# Altium PCB 蓝牙钥匙球锁20710.PcbDoc (part 2 of 2)
Units mil, origin at the board's own origin, x right, y up, seen from the top; angles counter-clockwise.
Board outline 1980 x 1974 mil, 2 copper layers (Top Layer, Bottom Layer); 82 components, 54 nets, 254 pads, 214 vias.
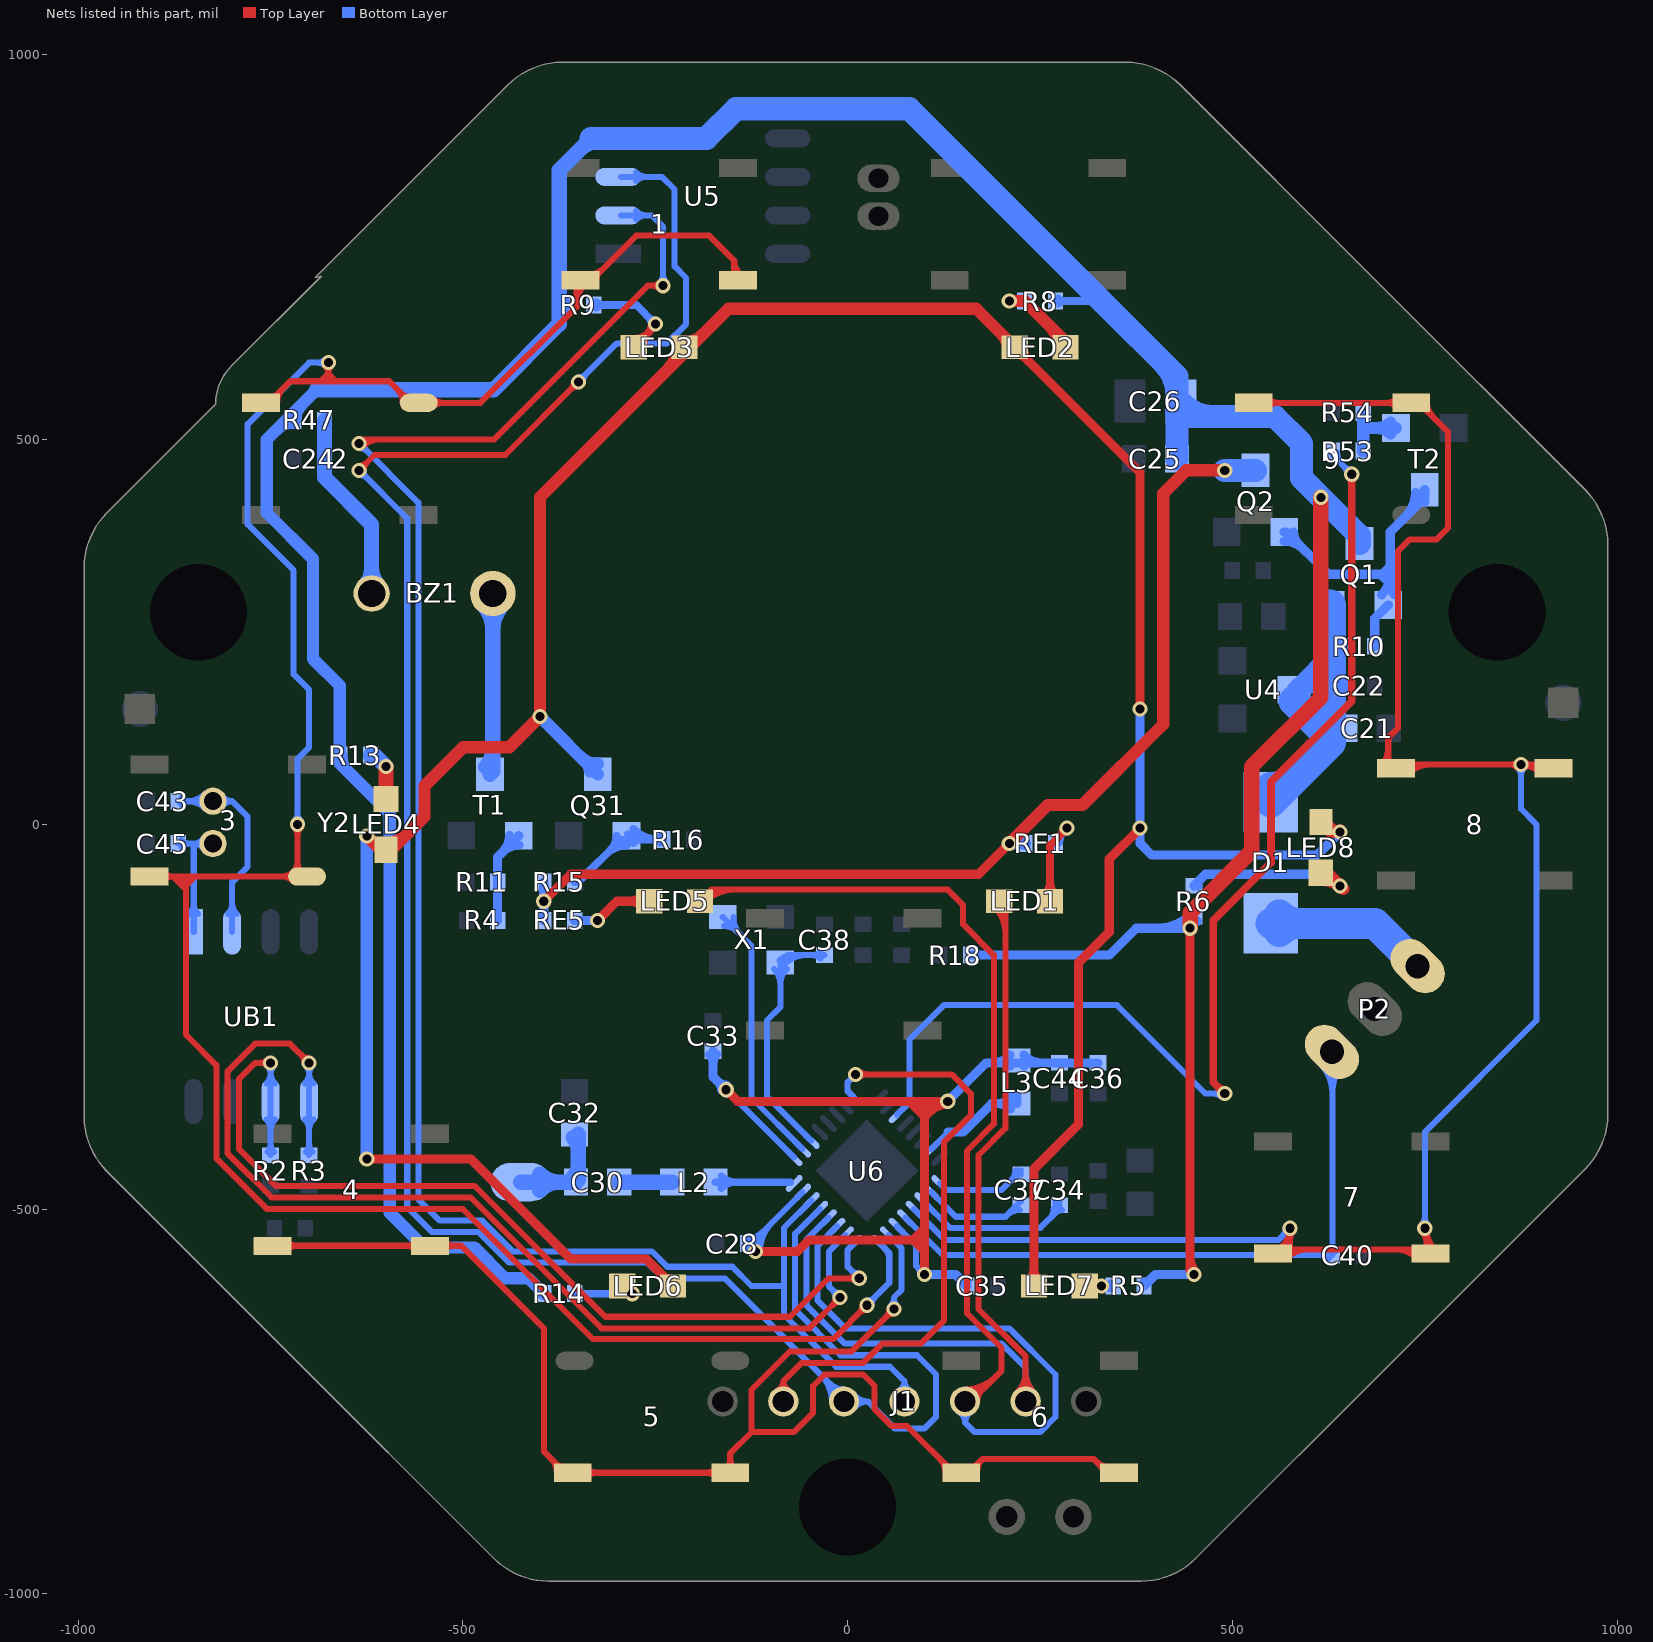
[diagram p2: the nets of this part, all layers, seen from the top]

## Via types
v1: diameter 19.68, hole 11.81, Top Layer to Bottom Layer, tented both sides, 214 vias

## Nets (pads, with @x,y where several pads share a name; then routed paths per layer and width w, separated by ;. In a path a pad name is that pad's centre, name@x,y a point inside that pad or via, vN(x,y) a via of type N, cw(c..) or ccw(c..) an arc to the next point about the centre after c; other vN are vias at no path point) (continued)
NetBZ1_1: BZ1.1 C24.2 R47.1 | length 302.6
  Bottom Layer w19.68: R47.1@-680,525 -680,451 -618.74,389.74 BZ1.1@-618.74,300 ; BZ1.1@-628.48,309.74 ccw(c-652.01,333.27) -618.74,333.27 ccw(c-585.47,333.27) BZ1.1@-609,309.74
NetBZ1_2: BZ1.2 T1.3 | length 336.7
  Bottom Layer w19.68: BZ1.2@-475.18,286.08 cw(c-508.78,252.48) -461.26,252.48 cw(c-413.74,252.48) BZ1.2@-447.34,286.08 ; T1.3@-470.77,74.42 ccw(c-493.72,97.38) -461.26,97.38 ; T1.3@-465,65 -461.26,68.74 BZ1.2@-461.26,300
NetC2_2: U6.2 X1.1 | length 389.5
  Bottom Layer w7.87: X1.1@-162.4,-120.47 -125,-157.87 -125,-355.68 U6.2@-58.52,-422.16 ; X1.1@-160.43,-132.28 cw(c-160.43,-156.05) -143.63,-139.24 ; X1.1@-148.62,-120.47 ccw(c-115.36,-120.47) -138.88,-144
NetC30_1: C30.1 L2.1 | length 69
  Bottom Layer w20: C30.1@-297,-465 L2.1@-228,-465
NetC30_2: C30.2 C32.2 pad.FR | length 225.9
  Bottom Layer w20: pad.FR@-425,-465 C30.2@-353,-465 ; pad.FR@-400.02,-475.61 cw(c-374.42,-501.21) -374.42,-465 cw(c-374.42,-428.79) pad.FR@-400.02,-454.39 ; C30.2@-357.06,-458.97 ccw(c-374.12,-441.91) -350,-441.91 ; C32.2@-357.1,-407.06 cw(c-374.23,-424.2) -350,-424.2 ; C30.2@-350,-462 C32.2@-350,-403
NetC34_1: C34.1 U6.19 | length 245.5
  Bottom Layer w7.87: U6.19@97.38,-488.97 132.97,-524.57 250.43,-524.57 275,-500 C34.1@275,-495 ; 262.72,-512.28 ccw(c250.66,-500.23) C34.1@267.71,-500.23 ; C34.1@270,-505 cw(c278.64,-513.64) C34.1@278.64,-501.42 ; C34.1@270,-500 270,-490 C34.1@275,-490
NetC37_1: C37.1 U6.17 | length 145.1
  Bottom Layer w7.87: U6.17@119.65,-466.7 127.95,-475 200,-475 220,-455 C37.1@225,-455 ; 210.36,-464.64 cw(c219,-473.29) C37.1@219,-461.06 ; 212.94,-462.06 ccw(c200.89,-450) C37.1@217.94,-450 ; C37.1@220,-450 C37.1@225,-450
NetC37_2: C37.2 U6.18 | length 157.2
  Bottom Layer w7.87: U6.18@108.52,-477.84 140.68,-510 205,-510 C37.2@225,-490 ; 206.82,-508.18 cw(c224,-525.36) C37.2@224,-501.06
NetC38_2: C38.2 U6.3 X1.3 | length 443
  Bottom Layer w7.87: X1.3@-95.95,-187.88 cw(c-116.11,-208.04) -87.6,-208.04 cw(c-59.08,-208.04) X1.3@-79.25,-187.88 ; X1.3@-88.41,-176.74 cw(c-72.13,-193.02) X1.3@-72.13,-170 ; X1.3@-82.85,-182.31 cw(c-53.12,-212.03) -53.12,-170 ; U6.3@-47.38,-411.03 -105,-353.41 -105,-255 -87.6,-237.6 X1.3@-87.6,-179.53 -78.07,-170 C38.2@-30,-170 ; C38.2@-35.29,-174.29 ccw(c-45.64,-184.64) -45.64,-170 ccw(c-45.64,-155.36) C38.2@-35.29,-165.71
NetC43_1: C43.1 UB1.2 Y2.2 | length 392.7
  Bottom Layer w8: C43.1@-870,30 -800,30 ; C43.1@-865.76,25.76 cw(c-855.51,15.51) -855.51,30 cw(c-855.51,44.49) C43.1@-865.76,34.24 ; -858.4,30 ccw(c-858.4,63.52) Y2.2@-834.7,39.82 ; -857.83,30 cw(c-857.83,-2.71) Y2.2@-834.7,20.42 ; Y2.2@-813.49,22.67 cw(c-800,13.94) -800,30 ; Y2.2@-813.38,37.4 ccw(c-800,45.79) -800,30 ; UB1.2@-805.52,-116.52 ccw(c-818.86,-103.19) -800,-103.19 ccw(c-781.14,-103.19) UB1.2@-794.48,-116.52 ; UB1.2@-800,-139.76 -800,-75 -780,-55 -780,10 -800,30
NetC45_2: C45.2 UB1.1 Y2.1 | length 244.1
  Bottom Layer w8: C45.2@-870,-25 -850,-25 ; C45.2@-865.76,-29.24 cw(c-855.51,-39.49) -855.51,-25 cw(c-855.51,-10.51) C45.2@-865.76,-20.76 ; UB1.1@-855.52,-116.52 ccw(c-868.86,-103.19) -850,-103.19 ccw(c-831.14,-103.19) UB1.1@-844.48,-116.52 ; UB1.1@-850,-139.76 -850,-25 ; Y2.1@-836.57,-32.37 ccw(c-850,-40.92) -850,-25 ; Y2.1@-836.57,-17.63 cw(c-850,-9.08) -850,-25 ; Y2.1@-825,-25 -850,-25
NetD1_1: D1.1 P2.1 | length 272.2
  Bottom Layer w40: D1.1@550,-128.74 685.1,-128.74 P2.1@740.68,-184.32 ; D1.1@560.91,-139.65 cw(c587.26,-166) 587.26,-128.74 cw(c587.26,-91.48) D1.1@560.91,-117.83
NetL2_2: L2.2 U6.32 | length 137.8
  Bottom Layer w10: L2.2@-172,-465 -75,-465 ; L2.2@-164.4,-472.6 cw(c-146.05,-490.95) -146.05,-465 cw(c-146.05,-439.05) L2.2@-164.4,-457.4
NetL3_2: L3.2 U6.15 | length 188
  Bottom Layer w7.87: U6.15@108.52,-422.16 130.68,-400
  Bottom Layer w11.81: L3.2@212,-353 L3.2@220,-353
  Bottom Layer w12: 130.68,-400 150,-400 187,-363 L3.2@215,-363 ; L3.2@211.14,-369.89 ccw(c194.5,-386.53) 194.5,-363 ccw(c194.5,-339.47) L3.2@211.14,-356.11 ; L3.2@220,-363 L3.2@215,-363 ; L3.2@220,-358 L3.2@215,-363
NetLED1_1: LED1.1 RE1.2 | length 225.8
  Top Layer w10: LED1.1@255.22,-92.22 ccw(c236.44,-73.44) 263,-73.44 ccw(c289.56,-73.44) LED1.1@270.78,-92.22 ; LED1.1@263,-100 263,-27 v1(285,-5) ; v1@280.16,-5 cw(c268.47,-5) 276.73,-13.27 cw(c285,-21.53) v1@285,-9.84
  Bottom Layer w10: RE1.2@270,-25 270,-20 v1(285,-5) ; RE1.2@275,-24 cw(c296.73,-24) v1@281.36,-8.64 ; v1@280.16,-5 cw(c268.47,-5) 276.73,-13.27 cw(c285,-21.53) v1@285,-9.84
NetLED2_1: LED2.1 R8.2 | length 152.5
  Top Layer w15.75: v1(210,680) 230,680 283,627 LED2.1@283,620 ; 262.47,647.53 cw(c234.94,620) LED2.1@273.87,620
  Bottom Layer w15.75: v1(210,680) R8.2@230,680
NetLED2_2: LED2.2 LED3.2 LED4.2 LED6.2 LED7.2 LED8.2 Q31.C | length 4323.1
  Top Layer w12: v1(-625,-435) -490,-435 -360,-565 -262,-565 LED6.2@-227,-600 ; -245.78,-581.22 cw(c-264.56,-600) LED6.2@-238,-600 ; LED6.2@-240.95,-586.05 ccw(c-229,-574.1) LED6.2@-229,-591 ; LED2.2@217,620 380,457 v1(380,150) ; LED2.2@219,611 cw(c219,594.1) LED2.2@230.95,606.05 ; LED2.2@228,620 ccw(c254.56,620) 235.78,601.22 ; LED7.2@235.64,-593.64 ccw(c220.27,-578.27) 242,-578.27 ccw(c263.73,-578.27) LED7.2@248.36,-593.64 ; LED7.2@242,-600 242,-448 300,-390 300,-180 340,-140 340,-45 v1(380,-5)
  Top Layer w16: v1(-625,-15) -607,-33 LED4.2@-600,-33 -593,-33 -550,10 -550,50 -500,100 -440,100 v1(-400,140) -400,425 -155,670 167,670 LED2.2@217,620 ; v1@-620.5,-19.5 ccw(c-607.18,-6.18) LED4.2@-601.95,-24.28 ; LED4.2@-600,-24 ccw(c-600,14.63) -572.69,-12.69 ; -232.31,592.69 ccw(c-259.63,620) LED3.2@-221,620 ; LED3.2@-210,627 ccw(c-210,655.97) -189.52,635.49 ; 201.64,635.36 cw(c186.27,620) LED2.2@208,620 ; LED8.2@615,3 628,-10 v1(640,-10) cw(c640,9.36) LED8.2@621.64,3.22 ; LED8.2@621,-3 ccw(c634.92,10.92) v1@639.57,-8.21
  Bottom Layer w12: v1(380,150) v1(380,-5) 380,-25 395,-40 610,-40 v1(640,-10)
  Bottom Layer w16: v1(-625,-435) v1(-625,-15) ; v1(-400,140) Q31.C@-325,65 ; -348.31,88.31 ccw(c-325,111.62) Q31.C@-325,78.65 ; Q31.C@-339.49,79.49 cw(c-350.32,68.65) Q31.C@-335,68.65
NetLED3_1: LED3.1 R9.2 | length 224
  Top Layer w10: LED3.1@-278,620 -250,648 v1(-250,650) ; LED3.1@-277,631 ccw(c-277,655.14) -259.93,638.07 ; LED3.1@-266,620 cw(c-237.03,620) -257.51,640.49 ; -259.68,638.32 ccw(c-271.36,650) v1@-254.84,650
  Bottom Layer w10: R9.2@-330,675 -275,675 v1(-250,650) ; R9.2@-326.46,671.46 cw(c-317.93,662.93) -317.93,675 cw(c-317.93,687.07) R9.2@-326.46,678.54 ; v1@-254.84,650 ccw(c-266.53,650) -258.27,658.27 ccw(c-250,666.53) v1@-250,654.84
NetLED4_1: LED4.1 R13.2 | length 79.6
  Top Layer w20: LED4.1@-600,33 v1(-600,75)
  Bottom Layer w20: R13.2@-620,89 cw(c-620,74.51) -609.76,84.76 ; R13.2@-620,90 -615,90 v1(-600,75)
NetLED5_1: LED5.1 RE5.2 | length 145.3
  Top Layer w12: v1(-325,-125) -300,-100 LED5.1@-258,-100 ; LED5.1@-266.07,-107.07 ccw(c-283.14,-124.14) -283.14,-100 ccw(c-283.14,-75.86) LED5.1@-266.07,-92.93
  Bottom Layer w12: RE5.2@-355,-125 v1(-325,-125)
NetLED6_1: LED6.1 R14.2 | length 109.3
  Top Layer w10: LED6.1@-295,-600 LED6.1@-293,-600
  Bottom Layer w10: R14.2@-355,-610 v1@-285,-610 ; R14.2@-351.46,-613.54 cw(c-342.93,-622.07) -342.93,-610 cw(c-342.93,-597.93) R14.2@-351.46,-606.46 ; v1@-283.42,-613.42 ccw(c-291.69,-621.69) -291.69,-610 ccw(c-291.69,-598.31) v1@-283.42,-606.58
  other v1: -280,-610
NetLED7_1: LED7.1 R5.2 | length 127.8
  Top Layer w10: LED7.1@308,-607 LED7.1@308,-600 v1(330,-600) ; LED7.1@318.04,-606.26 cw(c330,-614.54) v1(330,-600) ; LED7.1@318.04,-593.74 ccw(c330,-585.46) v1(330,-600) ; v1@326.58,-603.42 ccw(c318.31,-611.69) 318.31,-600 ccw(c318.31,-588.31) v1@326.58,-596.58
  Bottom Layer w10: v1(330,-600) R5.2@345,-600 ; v1@333.42,-603.42 cw(c341.69,-611.69) 341.69,-600 cw(c341.69,-588.31) v1@333.42,-596.58 ; R5.2@341.46,-603.54 ccw(c332.93,-612.07) 332.93,-600 ccw(c332.93,-587.93) R5.2@341.46,-596.46
NetLED8_1: LED8.1 R6.2 | length 276.2
  Top Layer w16: LED8.1@615,-72 cw(c615,-113.04) v1@644.02,-84.02 ; LED8.1@615,-63 623,-63 v1(640,-80)
  Bottom Layer w12: R6.2@450,-80 465,-65 625,-65 v1(640,-80) ; R6.2@455,-80 cw(c467.07,-80) R6.2@458.54,-71.46
NetQ1_G: Q1.G Q2.G R10.2 T2.3 | length 554.9
  Bottom Layer w12: Q2.G@567.4,368 cw(c567.4,332.76) 592.32,357.68 ; Q2.G@567.4,380 570,380 625,325 692.46,325 ; Q2.G@579.4,380 ccw(c602.1,380) 586.05,363.95 ; R10.2@685,231.42 685,267.6 Q1.G@702.4,285 ; Q1.G@693.92,298.24 ccw(c667.16,325) 705,325 ; Q1.G@710.89,298.24 cw(c725.1,312.46) 705,312.46 ; 725.03,400.03 ccw(c693.71,431.35) T2.3@738,431.35 ; T2.3@740.35,415.35 cw(c750,405.7) T2.3@750,419.35 ; 692.46,325 705,312.46 ; 692.46,325 695,325 ; 695,325 705,335 ; 695,325 705,325 ; 705,312.46 705,325 ; 705,325 705,335 ; 705,335 705,380 T2.3@740,415 ; T2.3@740,415 750,425 T2.3@750,435 740,425 T2.3@740,415
NetQ31_B: Q31.B R15.1 R16.2 | length 295.3
  Bottom Layer w10: R15.1@-355,-75 -350,-75 -295,-20 R16.2@-240,-20 ; R15.1@-355,-69 ccw(c-355,-42.44) -336.22,-61.22 ; -313.89,-38.89 cw(c-287.6,-65.18) Q31.B@-287.6,-28 ; -308.09,-33.09 ccw(c-326.18,-15) Q31.B@-300.6,-15 ; Q31.B@-285.48,-12.88 ccw(c-268.28,4.31) -268.28,-20 ccw(c-268.28,-34.31) Q31.B@-278.41,-24.19 ; Q31.B@-278.41,-5.81 ccw(c-244.14,28.46) R16.2@-244.14,-20 ; R16.2@-243.54,-23.54 ccw(c-252.07,-32.07) -252.07,-20 ccw(c-252.07,-7.93) R16.2@-243.54,-16.46
NetR1_2: 
NetR4_1: R4.1 R11.1 T1.1 | length 166.9
  Bottom Layer w12: R4.1@-455,-125 R11.1@-455,-75 -455,-42.4 T1.1@-427.6,-15 ; T1.1@-439.6,-15 cw(c-468.57,-15) -448.08,-35.49 cw(c-427.6,-55.97) T1.1@-427.6,-27
NetR53_2: R53.2 R54.2 T2.1 | length 130.5
  Bottom Layer w16: R53.2@670,485 670,515 ; R54.2@670,535 670,515 ; T2.1@705.53,507.93 ccw(c688.46,490.86) 688.46,515 ccw(c688.46,539.14) T2.1@705.53,522.07 ; T2.1@712.6,515 670,515
P04/LED_RED: J1.3 LED5.2 U6.27 | length 1955.4
  Top Layer w7.87: LED5.2@-193.31,-96.69 cw(c-165.1,-124.9) -165.1,-85 ; LED5.2@-192,-100 -177,-85 130,-85 150,-105 150,-130 190,-170 190,-389.4 155,-424.4 155,-635.6 200,-680.6 200,-710 160,-750 J1.3@152.52,-750 ; LED5.2@-187.75,-102.26 cw(c-146.09,-143.91) -146.09,-85 ; J1.3@152.52,-742.13 ccw(c152.52,-705.06) 178.73,-731.27 ; J1.3@152.52,-734.25 ccw(c152.52,-678.17) 192.17,-717.83 ; J1.3@168.27,-750 cw(c188.23,-750) 174.11,-735.89
  Bottom Layer w7.87: U6.27@-13.97,-522.38 -39.13,-547.54 -39.13,-619.06 -3.2,-655 210,-655 270,-715 270,-770 250,-790 165,-790 152.52,-777.52 ; J1.3@142.52,-745 J1.3@150.02,-752.5 ; J1.3@144.54,-763.58 cw(c136.35,-777.52) 152.52,-777.52 ; J1.3@152.52,-750 152.52,-777.52 ; J1.3@160.5,-763.58 ccw(c168.69,-777.52) 152.52,-777.52
P05/LED_GREEN: J1.2 LED1.2 U6.28 | length 1366.9
  Top Layer w7.87: LED1.2@191.18,-107.82 cw(c157.81,-141.19) 205,-141.19 ; LED1.2@192,-105 LED1.2@197,-100 205,-108 205,-245 205,-395 170,-430 170,-630 231.26,-691.26 J1.2@231.26,-750 ; LED1.2@196.75,-102.25 cw(c176.82,-122.18) 205,-122.18 ; J1.2@220.12,-738.86 ccw(c193.24,-711.98) 231.26,-711.98 ccw(c269.28,-711.98) J1.2@242.4,-738.86
  Bottom Layer w7.87: U6.28@-25.11,-511.25 -53.7,-539.84 -53.7,-625.1 -3.8,-675 200,-675 231.26,-706.26 J1.2@231.26,-750 ; J1.2@220.12,-738.86 ccw(c193.24,-711.98) 231.26,-711.98 ccw(c269.28,-711.98) J1.2@242.4,-738.86
P06/MOTO1: J1.5 U5.3 U6.29 | length 3223.3
  Top Layer w7.87: v1(-635,460) -615,480 -445,480 v1(-350,575) ; v1@-635,465.91 ccw(c-635,480.16) -624.92,470.08 ccw(c-614.84,460) v1@-629.09,460 ; v1@-355.91,575 cw(c-370.16,575) -360.08,564.92 cw(c-350,554.84) v1@-350,569.09
  Bottom Layer w7.87: v1@-635,454.09 cw(c-635,439.84) -624.92,449.92 cw(c-614.84,460) v1@-629.09,460 ; v1(-635,460) -572.46,397.46 -572.46,-497.54 -540,-530 -479.63,-530 -440.07,-569.57 -260.43,-569.57 -240,-590 -160,-590 -4.96,-745.04 J1.5@-4.96,-750 25.98,-750 ; v1(-350,575) -300,625 -235,625 -210,650 -210,710 -225,725 -225,825 -241.41,841.41 U5.3@-294.29,841.41 ; v1@-350,580.91 ccw(c-350,595.16) -339.92,585.08 ccw(c-329.84,575) v1@-344.09,575 ; U5.3@-275.18,835.84 cw(c-261.74,822.4) -261.74,841.41 cw(c-261.74,860.42) U5.3@-275.18,846.98 ; U6.29@-36.25,-500.11 -68.27,-532.13 -68.27,-631.13 -9.4,-690 90,-690 115,-715 115,-770 100,-785 60.98,-785 25.98,-750 ; -35.35,-714.65 cw(c-70.7,-750) J1.5@-20.71,-750 ; -23.38,-726.62 ccw(c-4.96,-708.21) J1.5@-4.96,-734.25 ; -21.91,-728.09 cw(c-43.82,-750) J1.5@-12.83,-750 ; J1.5@7.77,-759.27 cw(c25.98,-772.52) 25.98,-750 ; J1.5@7.77,-740.73 ccw(c25.98,-727.48) 25.98,-750
P07/MOTO0: J1.4 U5.2 U6.30 | length 2686.1
  Top Layer w7.87: v1(-635,495) -630,500 -460,500 -260,700 v1(-240,700) ; v1@-630.82,490.82 cw(c-608.67,468.67) -608.67,500 ; v1@-244.18,695.82 ccw(c-254.26,685.74) -254.26,700 ccw(c-254.26,714.26) v1@-244.18,704.18
  Bottom Layer w7.87: v1@-635,489.09 cw(c-635,474.84) -624.92,484.92 cw(c-614.84,495) v1@-629.09,495 ; v1(-635,495) -557.89,417.89 -557.89,-487.11 -530,-515 -475,-515 -435,-555 -254.4,-555 -234.4,-575 -150,-575 -125,-600 -82.83,-600 ; U5.2@-294.29,791.41 -255,791.41 -240,776.41 v1(-240,700) ; U5.2@-275.18,785.84 cw(c-261.74,772.4) -261.74,791.41 cw(c-261.74,810.42) U5.2@-275.18,796.98 ; v1@-244.18,704.18 ccw(c-254.26,714.26) -240,714.26 ccw(c-225.74,714.26) v1@-235.82,704.18 ; U6.30@-47.38,-488.97 -82.83,-524.43 -82.83,-600 ; J1.4@66.38,-736.1 ccw(c59.83,-723.78) 73.78,-723.78 ; J1.4@73.78,-750 73.78,-723.78 ; J1.4@81.18,-736.1 cw(c87.73,-723.78) 73.78,-723.78 ; -82.83,-600 -82.83,-637.17 -15,-705 55,-705 73.78,-723.78
PWR_CTL: R53.1 U6.11 | length 1607.3
  Top Layer w10: v1@485.16,-350 ccw(c473.47,-350) 481.73,-341.73 ccw(c490,-333.47) v1@490,-345.16 ; v1(490,-350) 475,-335 475,-125 550,-50 550,55 655,160 v1(655,455) ; v1@651.58,451.58 cw(c643.31,443.31) 655,443.31 cw(c666.69,443.31) v1@658.42,451.58
  Bottom Layer w7.87: U6.11@63.97,-377.62 80.43,-361.16 80.43,-279.57 125,-235 350,-235 465,-350 v1(490,-350) ; v1@485.82,-354.18 ccw(c475.74,-364.26) 475.74,-350 ccw(c475.74,-335.74) v1@485.82,-345.82 ; R53.1@630,485 630,480 v1(655,455) ; R53.1@636.06,484 ccw(c660.36,484) 643.18,466.82 ; v1@649.09,455 ccw(c634.84,455) 644.92,465.08 ccw(c655,475.16) v1@655,460.91
RD1_KEYX_2: 4.2 5.2 6.2 U6.23 | length 2315.8
  Top Layer w7.87: 4.2@-752.18,-547.7 -502.3,-547.7 -395,-655 -395,-815 -367.3,-842.7 -352.18,-842.7 5.2@-152.64,-842.7 ; 4.2@-729,-553.4 cw(c-715.23,-567.18) -715.23,-547.7 ; 4.2@-729,-542.27 ccw(c-715.89,-529.16) -715.89,-547.7 ; -574.77,-547.7 cw(c-574.77,-567.18) 4.2@-561,-553.4 ; -574.11,-547.7 ccw(c-574.11,-529.16) 4.2@-561,-542.27 ; 4.2@-524.27,-553.4 cw(c-510.5,-567.18) -510.5,-547.7 ; 4.2@-524.27,-542.27 ccw(c-511.17,-529.16) -511.17,-547.7 ; -385.71,-824.28 cw(c-404.26,-842.83) 5.2@-378.03,-842.83 ; 5.2@-378.49,-831.51 ccw(c-370.16,-823.17) 5.2@-370.16,-834.96 ; 5.2@-339,-848.4 cw(c-325.23,-862.18) -325.23,-842.7 ; 5.2@-339,-837.27 ccw(c-325.89,-824.16) -325.89,-842.7 ; -184.77,-842.7 cw(c-184.77,-862.18) 5.2@-171,-848.4 ; -184.11,-842.7 ccw(c-184.11,-824.16) 5.2@-171,-837.27 ; 5.2@-158.21,-837.27 ccw(c-171.65,-823.83) -152.64,-823.83 ccw(c-133.63,-823.83) 5.2@-147.07,-837.27 ; -40,-685 -75,-685 ; v1@54.09,-630 cw(c39.84,-630) 49.92,-640.08 cw(c60,-650.16) v1@60,-635.91 ; v1(60,-630) 5,-685 -75,-685 ; 119.29,-824.28 cw(c100.74,-842.83) 6.2@126.97,-842.83 ; 6.2@126.51,-831.51 ccw(c134.84,-823.17) 6.2@134.84,-834.96 ; 6.2@147.64,-837.64 6.2@147.64,-842.83 ; 6.2@147.81,-842.7 6.2@157.3,-842.7 ; 6.2@160.43,-834.96 ccw(c160.43,-823.84) 6.2@168.3,-831.7 ; 6.2@168.3,-842.43 cw(c191.25,-841.25) 175,-825 ; 323.17,-828.17 ccw(c339.57,-811.77) 6.2@339.57,-834.96 ; 327.35,-832.35 cw(c316.87,-842.83) 6.2@331.69,-842.83 ; 6.2@352.36,-842.83 337.83,-842.83 6.2@337.7,-842.7 ; 6.2@352.54,-842.7 6.2@337.7,-842.7 ; 5.2@-152.64,-842.7 -152.64,-847.83 -147.46,-842.66 -147.46,-837.7 -152.46,-842.7 5.2@-152.64,-842.7 ; 5.2@-152.64,-842.7 -152.64,-817.64 -125,-790 ; -125,-790 -125,-735 -75,-685 ; -125,-790 -70,-790 -45,-765 -45,-730 -30,-715 20,-715 35,-730 35,-760 57.06,-782.06 77.06,-782.06 137.83,-842.83 6.2@147.64,-842.83 ; 6.2@147.64,-842.83 157.17,-842.83 6.2@157.3,-842.7 ; 6.2@157.3,-842.7 175,-825 ; 175,-825 320,-825 6.2@337.7,-842.7
  Bottom Layer w7.87: U6.23@52.84,-533.52 70,-550.68 70,-605 60,-615 v1(60,-630) ; v1@55.82,-625.82 ccw(c45.74,-615.74) 60,-615.74 ccw(c74.26,-615.74) v1@64.18,-625.82
RSTN: J1.6 U6.8 | length 828.2
  Top Layer w7.87: J1.6@-91.14,-736.12 ccw(c-97.79,-723.7) -83.7,-723.7 ; J1.6@-83.7,-750 -83.7,-723.7 ; J1.6@-76.27,-736.12 cw(c-69.62,-723.7) -83.7,-723.7 ; v1(10,-325) 135,-325 160,-350 160,-378.2 125,-413.2 125,-645 95,-675 45,-675 20,-700 -60,-700 -83.7,-723.7 ; v1@14.92,-329.18 cw(c25,-339.26) 25,-325 cw(c25,-310.74) v1@14.92,-320.82
  Bottom Layer w7.87: U6.8@8.3,-355.35 0,-347.05 0,-335 v1(10,-325)
RX2/SETKEY: C40.1 P2.3 U6.21 | length 1020
  Bottom Layer w7.87: U6.21@75.11,-511.25 123.86,-560 565,-560 C40.1@630,-560 630,-296.36 P2.3@629.32,-295.68 ; P2.3@614.01,-310.99 cw(c575.41,-349.59) 630,-349.59 ; P2.3@619.58,-305.42 cw(c594.42,-330.58) 630,-330.58 ; C40.1@625.71,-564.29 ccw(c615.36,-574.64) 615.36,-560 ccw(c615.36,-545.36) C40.1@625.71,-555.71 ; C40.1@625.71,-554.71 ccw(c615.36,-544.36) 630,-544.36 ccw(c644.64,-544.36) C40.1@634.29,-554.71 ; 630,-346.32 cw(c679.96,-346.32) P2.3@644.63,-310.99 ; 630,-327.31 cw(c660.95,-327.31) P2.3@639.07,-305.42
SCL: R2.2 U6.25 UB1.6 | length 1405.4
  Top Layer w7.87: v1@-754.18,-314.18 ccw(c-764.26,-324.26) -764.26,-310 ccw(c-764.26,-295.74) v1@-754.18,-305.82 ; v1(-750,-310) -770,-310 -791.3,-331.3 -791.3,-421.9 -743.2,-470 -485,-470 -315,-640 -75,-640 -25,-590 v1(15,-590) ; v1@10.82,-594.18 ccw(c0.74,-604.26) 0.74,-590 ccw(c0.74,-575.74) v1@10.82,-585.82
  Bottom Layer w7.87: UB1.6@-755.57,-383.52 cw(c-769.01,-396.96) -750,-396.96 cw(c-730.99,-396.96) UB1.6@-744.43,-383.52 ; UB1.6@-755.57,-336.95 ccw(c-769.01,-323.51) -750,-323.51 ccw(c-730.99,-323.51) UB1.6@-744.43,-336.95 ; R2.2@-754.29,-425.71 ccw(c-764.64,-415.36) -750,-415.36 ccw(c-735.36,-415.36) R2.2@-745.71,-425.71 ; v1@-754.18,-314.18 cw(c-764.26,-324.26) -750,-324.26 cw(c-735.74,-324.26) v1@-745.82,-314.18 ; R2.2@-750,-430 UB1.6@-750,-360.24 v1(-750,-310) ; U6.25@8.3,-544.65 0,-552.95 0,-575 v1(15,-590) ; v1@9.09,-590 ccw(c-5.16,-590) 4.92,-579.92 ccw(c15,-569.84) v1@15,-584.09
SDA: R3.2 U6.26 UB1.5 | length 1533.4
  Top Layer w7.87: v1@-705.91,-310 ccw(c-720.16,-310) -710.08,-299.92 ccw(c-700,-289.84) v1@-700,-304.09 ; v1(-700,-310) -725,-285 -770,-285 -805.87,-320.87 -805.87,-427.93 -748.8,-485 -490,-485 -320,-655 -50,-655 v1(-10,-615) ; v1@-15.91,-615 cw(c-30.16,-615) -20.08,-625.08 cw(c-10,-635.16) v1@-10,-620.91
  Bottom Layer w7.87: UB1.5@-705.57,-383.52 cw(c-719.01,-396.96) -700,-396.96 cw(c-680.99,-396.96) UB1.5@-694.43,-383.52 ; UB1.5@-705.57,-336.95 ccw(c-719.01,-323.51) -700,-323.51 ccw(c-680.99,-323.51) UB1.5@-694.43,-336.95 ; R3.2@-704.29,-425.71 ccw(c-714.64,-415.36) -700,-415.36 ccw(c-685.36,-415.36) R3.2@-695.71,-425.71 ; v1@-704.18,-314.18 cw(c-714.26,-324.26) -700,-324.26 cw(c-685.74,-324.26) v1@-695.82,-314.18 ; R3.2@-700,-430 UB1.5@-700,-360.24 v1(-700,-310) ; v1@-15.91,-615 ccw(c-30.16,-615) -20.08,-604.92 ccw(c-10,-594.84) v1@-10,-609.09 ; v1(-10,-615) -24.57,-600.43 -24.57,-555.24 U6.26@-2.84,-533.52
TD1_KEYX_1: 1.2 2.2 3.2 U6.24 | length 3849.8
  Top Layer w7.87: 3.2@-907.36,-67.83 3.2@-907.22,-67.7 ; 3.2@-888.64,-62.65 ccw(c-877.5,-52.88) -877.5,-67.7 ; 3.2@-888.51,-72.86 cw(c-877.5,-82.01) -877.5,-67.7 ; -835,-67.7 -847.7,-67.7 ; 2.2@-752.54,547.7 -724.4,575.84 -685,575.84 ; 2.2@-749.57,555.71 ccw(c-749.57,567.87) 2.2@-740.96,559.27 ; 2.2@-741.69,547.83 cw(c-715.84,547.83) -734.12,566.12 ; -734.77,-67.7 cw(c-734.77,-87.18) -721,-73.4 ccw(c-734.44,-86.84) -734.44,-67.83 ccw(c-734.44,-48.83) 3.2@-721,-62.27 ; -734.11,-67.7 ccw(c-734.11,-49.16) 3.2@-721,-62.27 ; v1@-719.18,-4.18 cw(c-729.26,-14.26) -715,-14.26 cw(c-700.74,-14.26) v1@-710.82,-4.18 ; 3.2@-718.41,-60.54 ccw(c-720.48,-55.47) -715,-55.47 ; -715.65,-54.83 cw(c-722.26,-61.44) 3.2@-715.43,-67.83 ; -715,-49.87 ccw(c-697.47,-49.87) 3.2@-709.87,-62.27 ; -715,-47.78 cw(c-735.49,-47.78) 3.2@-721,-62.27 ; v1(-715,0) -715,-55.47 ; 3.2@-711.75,-60.88 cw(c-708.89,-55.47) -715,-55.47 ; 3.2@-700,-65.24 -702.46,-67.7 3.2@-702.78,-67.7 ; v1@-679.16,595.8 cw(c-689.03,585.84) -675,585.84 ; v1(-675,600) -675,585.84 ; v1@-670.84,595.8 ccw(c-660.97,585.84) -675,585.84 ; -585.71,565.71 cw(c-603.59,547.83) 2.2@-578.31,547.83 ; -579.44,559.44 ccw(c-570.43,568.44) 2.2@-570.43,555.71 ; 2.2@-539.27,542.27 cw(c-526.17,529.16) -526.17,547.7 ; 2.2@-539.27,553.4 ccw(c-525.5,567.18) -525.5,547.7 ; -352.19,676.51 cw(c-316.71,676.51) 1.2@-341.79,701.6 ; 1.2@-352.19,695.52 cw(c-335.72,695.52) 1.2@-347.36,707.17 -332.83,707.17 -275,765 -180,765 -147.46,732.46 ; 1.2@-352.19,697.3 -352.19,672.82 -477.3,547.7 -567.7,547.7 -595.84,575.84 -665,575.84 ; 1.2@-334.57,715.04 ccw(c-334.57,738.23) -318.17,721.83 ; 1.2@-326.69,707.17 cw(c-311.87,707.17) -322.35,717.65 ; 1.2@-150,700 -147.46,702.54 -147.46,732.46 ; 1.2@-137.93,713.48 cw(c-123.79,732.46) -147.46,732.46 ; v1@19.09,-625 cw(c4.84,-625) 14.92,-635.08 cw(c25,-645.16) v1@25,-630.91 ; v1(25,-625) -19,-669 -331,-669 -500,-500 -754.4,-500 -820.43,-433.97 -820.43,-312.97 -860,-273.4 -860,-85.2 ; 3.2@-885,-67.7 -907.19,-67.7 3.2@-885,-67.7 ; 3.2@-885,-67.7 -877.5,-67.7 ; -877.5,-67.7 -860,-85.2 ; -877.5,-67.7 -870,-67.7 ; -870,-67.7 -860,-77.7 ; -870,-67.7 -860,-67.7 ; -860,-85.2 -860,-80 ; -860,-80 -847.7,-67.7 ; -860,-80 -860,-77.7 ; -860,-77.7 -860,-67.7 ; -860,-67.7 -847.7,-67.7 ; -847.7,-67.7 -745,-67.7 ; -745,-67.7 -744.86,-67.83 3.2@-702.64,-67.83 3.2@-702.78,-67.7 ; -745,-67.7 3.2@-702.78,-67.7 ; -715,-55.47 3.2@-702.78,-67.7 ; -685,575.84 -675,575.84 ; -685,575.84 -675,585.84 ; -675,575.84 -665,575.84 ; -675,575.84 -675,585.84 ; -675,585.84 -665,575.84
  Bottom Layer w7.87: v1@-719.18,4.18 ccw(c-729.26,14.26) -715,14.26 ccw(c-700.74,14.26) v1@-710.82,4.18 ; v1(-715,0) -715,85 -700,100 -700,175 -720,195 -720,330 -780,390 -780,520 -700,600 v1(-675,600) ; v1@-679.18,595.82 ccw(c-689.26,585.74) -689.26,600 ccw(c-689.26,614.26) v1@-679.18,604.18 ; v1(25,-625) 54,-596 54,-556.95 U6.24@41.7,-544.65 ; v1@25,-619.09 ccw(c25,-604.84) 35.08,-614.92 ccw(c45.16,-625) v1@30.91,-625 ; U6.24@48.66,-551.61 cw(c35.78,-564.5) 54,-564.5
TX2_KEYX_3: 7.2 8.2 9.2 U6.20 | length 2930.4
  Top Layer w7.87: 9.2@546,542.27 cw(c559.11,529.16) 559.11,547.7 ; 9.2@546,553.4 ccw(c559.78,567.18) 559.78,547.7 ; 9.2@547.46,547.7 9.2@742.36,547.7 ; 7.2@550,-550.51 7.2@547.82,-552.7 ; 7.2@561.02,-551.31 ccw(c543.25,-525) v1(575,-525) 7.2@575,-552.7 ; 7.2@562.3,-552.7 7.2@547.82,-552.7 ; v1@570.82,-529.18 cw(c560.74,-539.26) 575,-539.26 cw(c589.26,-539.26) v1@579.18,-529.18 ; 7.2@571,-563.4 cw(c596.85,-589.25) 596.85,-552.7 ; 575,-539.82 cw(c553.26,-539.82) 565.43,-557.83 cw(c577.84,-570.24) 577.84,-552.7 ; 8.2@694.27,78.4 ccw(c674.51,98.16) 702.46,98.16 ; 700.22,547.7 ccw(c700.22,567.18) 9.2@714,553.4 ; 700.89,547.7 cw(c700.89,529.16) 9.2@714,542.27 ; 702.46,85.52 ccw(c712.53,85.52) 8.2@705.41,78.4 ; 713.15,-552.7 cw(c713.15,-589.25) 7.2@739,-563.4 ; 8.2@725.43,72.83 cw(c737.17,61.1) 8.2@737.17,77.7 ; 8.2@731,67.27 cw(c756.18,42.09) 756.18,77.7 ; 732.16,-552.7 cw(c732.16,-570.24) 7.2@744.57,-557.83 ; 9.2@742.36,547.83 780,510.2 780,385 765,370 730,370 715,355 715,125 702.46,112.46 702.46,77.7 8.2@907.18,77.7 ; 9.2@745.16,539.96 cw(c745.16,527.7) 9.2@753.83,536.37 ; v1@745.82,-529.18 cw(c729.61,-545.39) 752.54,-545.39 ; v1(750,-525) v1@752.54,-527.54 ; 7.2@752.54,-546.33 ccw(c768.68,-546.33) 7.2@757.36,-557.83 ; 9.2@753.03,547.83 ccw(c778.79,547.83) 760.58,529.62 ; 7.2@762.88,-552.22 cw(c787.15,-527.54) v1@752.54,-527.54 ; 860.41,77.7 cw(c860.41,62.97) v1@870.82,73.38 ; 861.08,77.7 ccw(c861.08,91.48) v1@870.82,81.73 ; v1@873.82,77.7 cw(c873.82,42.09) 8.2@899,67.27 ; v1@879.18,73.38 cw(c889.59,62.97) 889.59,77.7 ; v1@879.18,81.73 ccw(c888.92,91.48) 888.92,77.7 ; 8.2@892.83,77.7 cw(c892.83,61.1) 8.2@904.57,72.83 ; 7.2@547.82,-552.7 7.2@575,-552.7 ; 7.2@575,-552.7 752.54,-552.7 v1@752.54,-527.54
  Bottom Layer w7.87: U6.20@86.25,-500.11 126.14,-540 560,-540 v1(575,-525) ; v1@569.09,-525 cw(c554.84,-525) 564.92,-535.08 cw(c575,-545.16) v1@575,-530.91 ; v1@745.82,-520.82 ccw(c735.74,-510.74) 750,-510.74 ccw(c764.26,-510.74) v1@754.18,-520.82 ; v1(750,-525) 750,-400 895,-255 895,0 875,20 v1(875,77.56) ; v1@870.82,73.38 cw(c860.74,63.3) 875,63.3 cw(c889.26,63.3) v1@879.18,73.38
V6V: C25.1 C26.1 Q1.D R5.1 R6.1 R8.1 R9.1 R13.1 R14.1 R18.1 R47.2 U5.4 | length 5317.6
  Top Layer w12: 445,-563.65 ccw(c471.35,-563.65) v1@452.72,-582.28 ; v1(445,-135) 445,-580 v1(450,-585)
  Top Layer w20: v1(445,-135) 445,-115 525,-35 525,75 615,165 v1(615,425)
  Bottom Layer w10: R8.1@270,680 330,680 ; R8.1@273.54,676.46 cw(c282.07,667.93) 282.07,680 cw(c282.07,692.07) R8.1@273.54,683.54
  Bottom Layer w12: R18.1@160,-170 340,-170 375,-135 v1(445,-135) 450,-130 R6.1@450,-120 cw(c436.7,-120) v1@443.14,-131.64 ; R5.1@385,-600 400,-585 v1(450,-585) ; R5.1@385,-595 ccw(c385,-582.93) R5.1@393.54,-591.46 ; 403.13,-135 ccw(c403.13,-74.13) R6.1@446.17,-117.17 ; 432.1,-135 ccw(c432.1,-103.1) R6.1@454.66,-125.66
  Bottom Layer w16: -742.19,512.81 cw(c-720,490.62) R47.2@-720,522 ; R47.2@-718,526 cw(c-691.44,526) -710.22,544.78 ; -690,565 -755,500 -755,405 -695,345 -695,215 -660,180 R13.1@-660,90 -660,79 -595,14 -595,-505 -550,-550 -485,-550 -445,-590 -415,-590 R14.1@-395,-610 ; R13.1@-658,89 ccw(c-629.03,89) -649.51,68.51
  Bottom Layer w20: -690,565 -460,565 -375,650 -375,850 -333.59,891.41 ; -375,661.93 cw(c-357.93,661.93) R9.1@-370,674 ; -375,688.07 ccw(c-357.93,688.07) R9.1@-370,676 ; -348.99,876.01 cw(c-316.18,843.2) U5.4@-316.18,889.6 ; -342.29,882.71 cw(c-323.41,863.82) U5.4@-316.64,889.66
  Bottom Layer w30: -333.59,891.41 -183.59,891.41 -145,930 80,930 330,680 428,582 C26.1@428,530 ; 411.03,598.97 cw(c370.06,558) C26.1@428,558 ; C25.1@428,475 C26.1@428,530 ; 428,517.86 cw(c457.14,517.86) C26.1@436.54,538.46 ; C26.1@436.54,545.54 ccw(c474.04,583.04) 474.04,530 ; Q1.D@665,365 665,375 v1(615,425) 590,450 590,495 555,530 C26.1@428,530
VBAT: C21.1 C22.1 D1.2 Q1.S R10.1 U4.3 | length 523
  Bottom Layer w20: U4.3@580,175 U4.3@585,180 ; C22.1@645,180 627.6,180 U4.3@585,180 ; R10.1@645,231.42 636.42,231.42 627.6,222.6 U4.3@585,180
  Bottom Layer w40: D1.2@550,28.74 627.6,106.34 627.6,180 627.6,222.6 Q1.S@627.6,285 ; D1.2@550,48.11 ccw(c550,94.87) D1.2@583.07,61.81 ; U4.3@580,160 615,125
VDD: C28.2 C33.2 C35.2 C36.2 C44.2 L3.1 U6.1 U6.22 U6.31 | length 1868.6
  Top Layer w11.81: v1(-157.95,-345) -142.95,-360 -15,-360 ; v1(-120,-555) -65,-555 -50,-540 85,-540 ; 30,-360 -15,-360 ; v1(100,-585) 100,-555 ; 100,-510 100,-525 ; 106.21,-373.79 cw(c130,-397.58) v1@130,-363.94 ; 115,-365 cw(c122.53,-372.53) v1@127.98,-363.38 ; v1(130,-360) 120,-360 ; -15,-360 80,-360 ; 80,-360 100,-360 ; 80,-360 100,-380 ; 85,-540 100,-525 ; 85,-540 100,-540 ; 85,-540 100,-555 ; 100,-555 100,-540 ; 100,-540 100,-525 ; 100,-525 100,-380 ; 100,-380 100,-360 ; 100,-380 120,-360 ; 100,-360 120,-360
  Bottom Layer w7.87: v1@-157.95,-350.91 cw(c-157.95,-365.16) -147.87,-355.08 cw(c-137.79,-345) v1@-152.04,-345 ; v1(-157.95,-345) U6.1@-69.65,-433.3 ; C28.2@-130,-545 -125.68,-545 U6.31@-58.52,-477.84 ; C28.2@-130,-537.94 ccw(c-130,-510.45) -110.56,-529.89 ; C28.2@-129.84,-555 cw(c-115.76,-555) C28.2@-125.72,-545.04 ; C28.2@-121.97,-555 cw(c-88.87,-555) -112.27,-531.6 ; v1@-114.09,-555 cw(c-61.99,-555) -98.83,-518.16 ; U6.22@63.97,-522.38 89,-547.41 89,-574 v1(100,-585) ; v1@94.09,-585 ccw(c79.84,-585) 89.92,-574.92 ccw(c100,-564.84) v1@100,-579.09
  Bottom Layer w11.81: v1(130,-360) 180,-310 C44.2@275,-310 C36.2@325,-310 ; 187.03,-310 ccw(c187.03,-276) L3.1@211.07,-300.04 ; 201.51,-310 cw(c201.51,-323.52) L3.1@211.07,-313.96 ; L3.1@228.93,-313.96 cw(c238.49,-323.52) 238.49,-310 ; L3.1@228.93,-300.04 ccw(c252.97,-276) 252.97,-310
  Bottom Layer w12: C33.2@-179.29,-299.29 cw(c-189.64,-309.64) -175,-309.64 cw(c-160.36,-309.64) C33.2@-170.71,-299.29 ; C33.2@-175,-295 -175,-327.95 v1(-157.95,-345) ; v1@-163.85,-345 ccw(c-178.11,-345) -168.03,-334.92 ccw(c-157.95,-324.84) v1@-157.95,-339.09 ; C28.2@-130,-545 v1(-120,-555) ; v1(100,-585) 140,-585 C35.2@155,-600 ; C35.2@146.46,-591.46 ccw(c155,-582.93) C35.2@155,-595
VDD3V3: Q2.D R15.2 RE1.1 RE5.1 | length 1402.7
  Top Layer w12: v1(-395,-100) -360,-65 170,-65 v1(210,-25)
  Top Layer w16: v1(210,-25) 260,25 305,25 410,130 410,430 440,460 v1(490,460)
  Bottom Layer w12: RE5.1@-395,-125 R15.2@-395,-75
  Bottom Layer w16: v1(210,-25) RE1.1@230,-25
  Bottom Layer w30: v1(490,460) Q2.D@530,460
pads on no net: U5. U5.1 U6.9 U6.13 UB1. UB1.3 UB1.7 Y2.3

## Polygon pours and split planes (outlines as drawn)
GND on Top Layer "Top Layer-No Net" (hatched 45Degree grid 9 track 11, remove dead copper, pour order 4): -1140,1095 1040,1095 1040,-1050 -1135,-1050 -1160,-1050 -1160,1095 -1135,1095
GND on Bottom Layer "Top Layer-No Net" (hatched 45Degree grid 11 track 15, remove dead copper, pour order 3): -1140,1095 1040,1095 1040,-1050 -1135,-1050 -1160,-1050 -1160,1095 -1135,1095

## Keep-outs
Keep-Out Layer:
  circle w5: c0,299.21 r342.52
  pour cut-out: -10,750 -25,765 -25,865 -10,880 75,880 90,865 90,765 75,750
  lines w5: -977.44,153.21 ccw(c-0.01,-0.01) -700.71,-698.48 ; -977.16,154.61 cw(c-4.87,1.61) -880.78,450.54 ; -880.83,450.56 cw(c-0.01,-0.01) -700.71,698.47 ; -700.67,-698.45 ccw(c-670.59,-668.47) -636.24,-693.43 -608.38,-655.08 cw(c-521.36,-717.58) -434.68,-780.56 -462.88,-819.38 ccw(c-428.53,-844.34) -447.74,-882.21 ; -700.68,698.43 cw(c-670.6,668.45) -636.25,693.41 -608.04,654.59 ccw(c-521.36,717.57) -435.03,781.02 -462.89,819.36 cw(c-428.54,844.32) -447.76,882.19 ; -447.77,-882.25 ccw(c-0.01,0) 447.76,-882.25 ; -447.77,882.24 cw(c-0.01,-0.01) 447.75,882.24 ; 447.73,-882.2 ccw(c428.51,-844.34) 462.87,-819.38 435.01,-781.03 cw(c521.34,-717.58) 608.02,-654.6 636.23,-693.42 ccw(c670.58,-668.46) 700.66,-698.44 ; 447.72,882.2 cw(c428.5,844.33) 462.86,819.37 434.66,780.55 ccw(c521.33,717.57) 608.36,655.07 636.22,693.42 cw(c670.57,668.46) 700.65,698.44 cw(c-0.02,0) 889.95,432.09 ; 700.69,-698.48 ccw(c-0.01,-0.01) 977.42,153.21 ; 889.67,432.16 cw(c4.99,0.78) 977.37,153.2

## Other copper
Top Layer:
  region net M3V3: 235,-925 235,-875 180,-875 180,-925
  pour cut-out: -140,-425 -125,-440 -125,-485 -140,-500 -455,-500 -475,-480 -475,-440 -460,-425
Bottom Layer:
  region net GND: 350,-380 350,-339 260,-339 260,-380
  region net GND: -698,490 -698,500 -730,500 -730,490
  region net GND: -698,451 -698,495 -730,495 -730,451
  region net GND: 304,-525 304,-430 297,-430 297,-525
  region net GND: 426.04,-528 426.04,-475 300,-475 300,-528
  region net GND: 301.5,-465 301.5,-430 250,-430 250,-465
  region net GND: -280,-365 -280,-305 -423.54,-305 -423.54,-365
  region net GND: -675,-184.79 -675,-82.62 -720,-82.62 -720,-184.79
  region net GND: -645,-570.82 -645,-498.5 -717.32,-498.5 -717.32,-570.82
  region net GND: 317.72,-912.28 300.04,-894.6 287.32,-907.32 305,-925
  region net GND: 305,-925 305,-890 270,-890 270,-925
  region net GND: 298.97,-911.03 271.09,-883.16 247.39,-906.86 275.26,-934.74
  region net GND: 328.49,-914.85 328.49,-869.68 252.07,-869.68 252.07,-914.85
  region net GND: 535,105 535,170 475,170 475,105
  region net GND: -35.72,775 -35.72,855 -135,855 -135,775
  region net GND: -900,-61.26 -900,70 -942.17,70 -942.17,-61.26
  region net GND: 390,570 344.36,615.64 294.86,566.14 340.5,520.5
  region net GND: 390,425 390,570 335,570 335,425
  region net GND: 575,285 575,341.5 535,341.5 535,285
  region net GND: 585,215 585,325 535,325 535,215
  region net GND: 85,-450 85,-425 58.41,-425 58.41,-450
  region net GND: -155,-563 -155,-518 -203,-518 -203,-563
  region net GND: 295.13,-371.88 274.13,-350.87 251.5,-373.5 272.51,-394.51
  region net M3V3: 398,-460 398,-413 314,-413 314,-460
  region net GND: -143,-270 -143,-161 -205,-161 -205,-270
  region net GND: -163.92,-170.08 -191.5,-142.5 -213.33,-164.33 -185.76,-191.91
  region net GND: 227.69,-627.69 227.69,-575 180,-575 180,-627.69
  region net GND: -32.38,-140 -32.38,-90 -122.95,-90 -122.95,-140
  region net GND: 333.23,-502.24 282.54,-443.5 273.07,-451.66 323.76,-510.4
  region net VBAT: 610,65 610,175 560,175 560,65
  region net VBAT: 593.13,71.87 570,95 537.5,62.5 560.63,39.37
  region net GND: 755,75 755,190.17 685,190.17 685,75
  region net M3V3: 470,390 475,395 505,395 510,390 510,190 505,185 480,185 470,195
  region net GND: -105,-95 285,-95 285,-135 265,-145 -105,-145 -115,-135 -115,-105
  region net NetL2_2: -190,-450 -190,-480 -185,-485 -155,-485 -145,-475 -75,-475 -65,-465 -65,-460 -145,-460 -155,-445 -185,-445
  region net NetC30_1: -310,-445 -315,-450 -315,-480 -310,-485 -215,-485 -210,-480 -210,-450 -215,-445
  region net NetC30_2: -425,-440 -390,-440 -375,-425 -375,-385 -370,-380 -340,-380 -335,-385 -335,-480 -340,-485 -425,-485
  pour cut-out: -85,-405 -50,-440 -50,-490 -75,-515 -315,-515 -350,-550 -525,-550 -550,-525 -550,-400 -525,-375 -400,-375 -390,-365 -315,-365 -275,-405
  region net VDD: 195,-290 330,-290 340,-300 340,-320 335,-325 170,-325 170,-315

## Silkscreen, mask and mechanical layers (free items; w line width, h text height)
Top Overlay:
  circle w3.94: c-843.7,275.59 r106.3
  circle w3.94: c0,-887.01 r106.3
  circle w3.94: c843.7,275.59 r106.3
  text "TL-101" at -600,-250 h60
  text "JYD-QS" at -450,-425 h40
  text "20-7-10" at -450,-500 h40
  text "V1.0" at -125,-500 h40
Bottom Overlay:
  lines w3: -299.21,125.79 -299.21,-492.13 299.21,-492.13 299.21,124.21 ; -165.35,605.35 -165.35,807.09 165.35,807.09 165.35,609.65
  text "M-" at 200,850 h30 r180
  text "M+" at 200,800 h30 r180
  text "+" at -665,270 h60
  text "BAT" at 900,-125 h40 r315
  text "GND" at 785,-360 h40 r315
  text "TKEY" at 685,-450 h30 r315
  text "GND" at -175,-700 h30 r270
  text "RST" at -100,-700 h30 r270
  text "P06" at -20,-700 h30 r270
  text "P07" at 60,-700 h30 r270
  text "P04" at 165,-800 h30 r90
  text "P05" at 250,-800 h30 r90
  text "3V3" at 325,-800 h30 r90

## Dimensions
989.37,-78.74 to -989.37,-78.74 on Mechanical 1